# Altium PCB sensors_power_0v2.PcbDoc
Units mm, origin at the board's own origin, x right, y up, seen from the top; angles counter-clockwise.
Board outline 50 x 50 mm, 2 copper layers (Top Layer, Bottom Layer); 60 components, 69 nets, 200 pads, 58 vias.
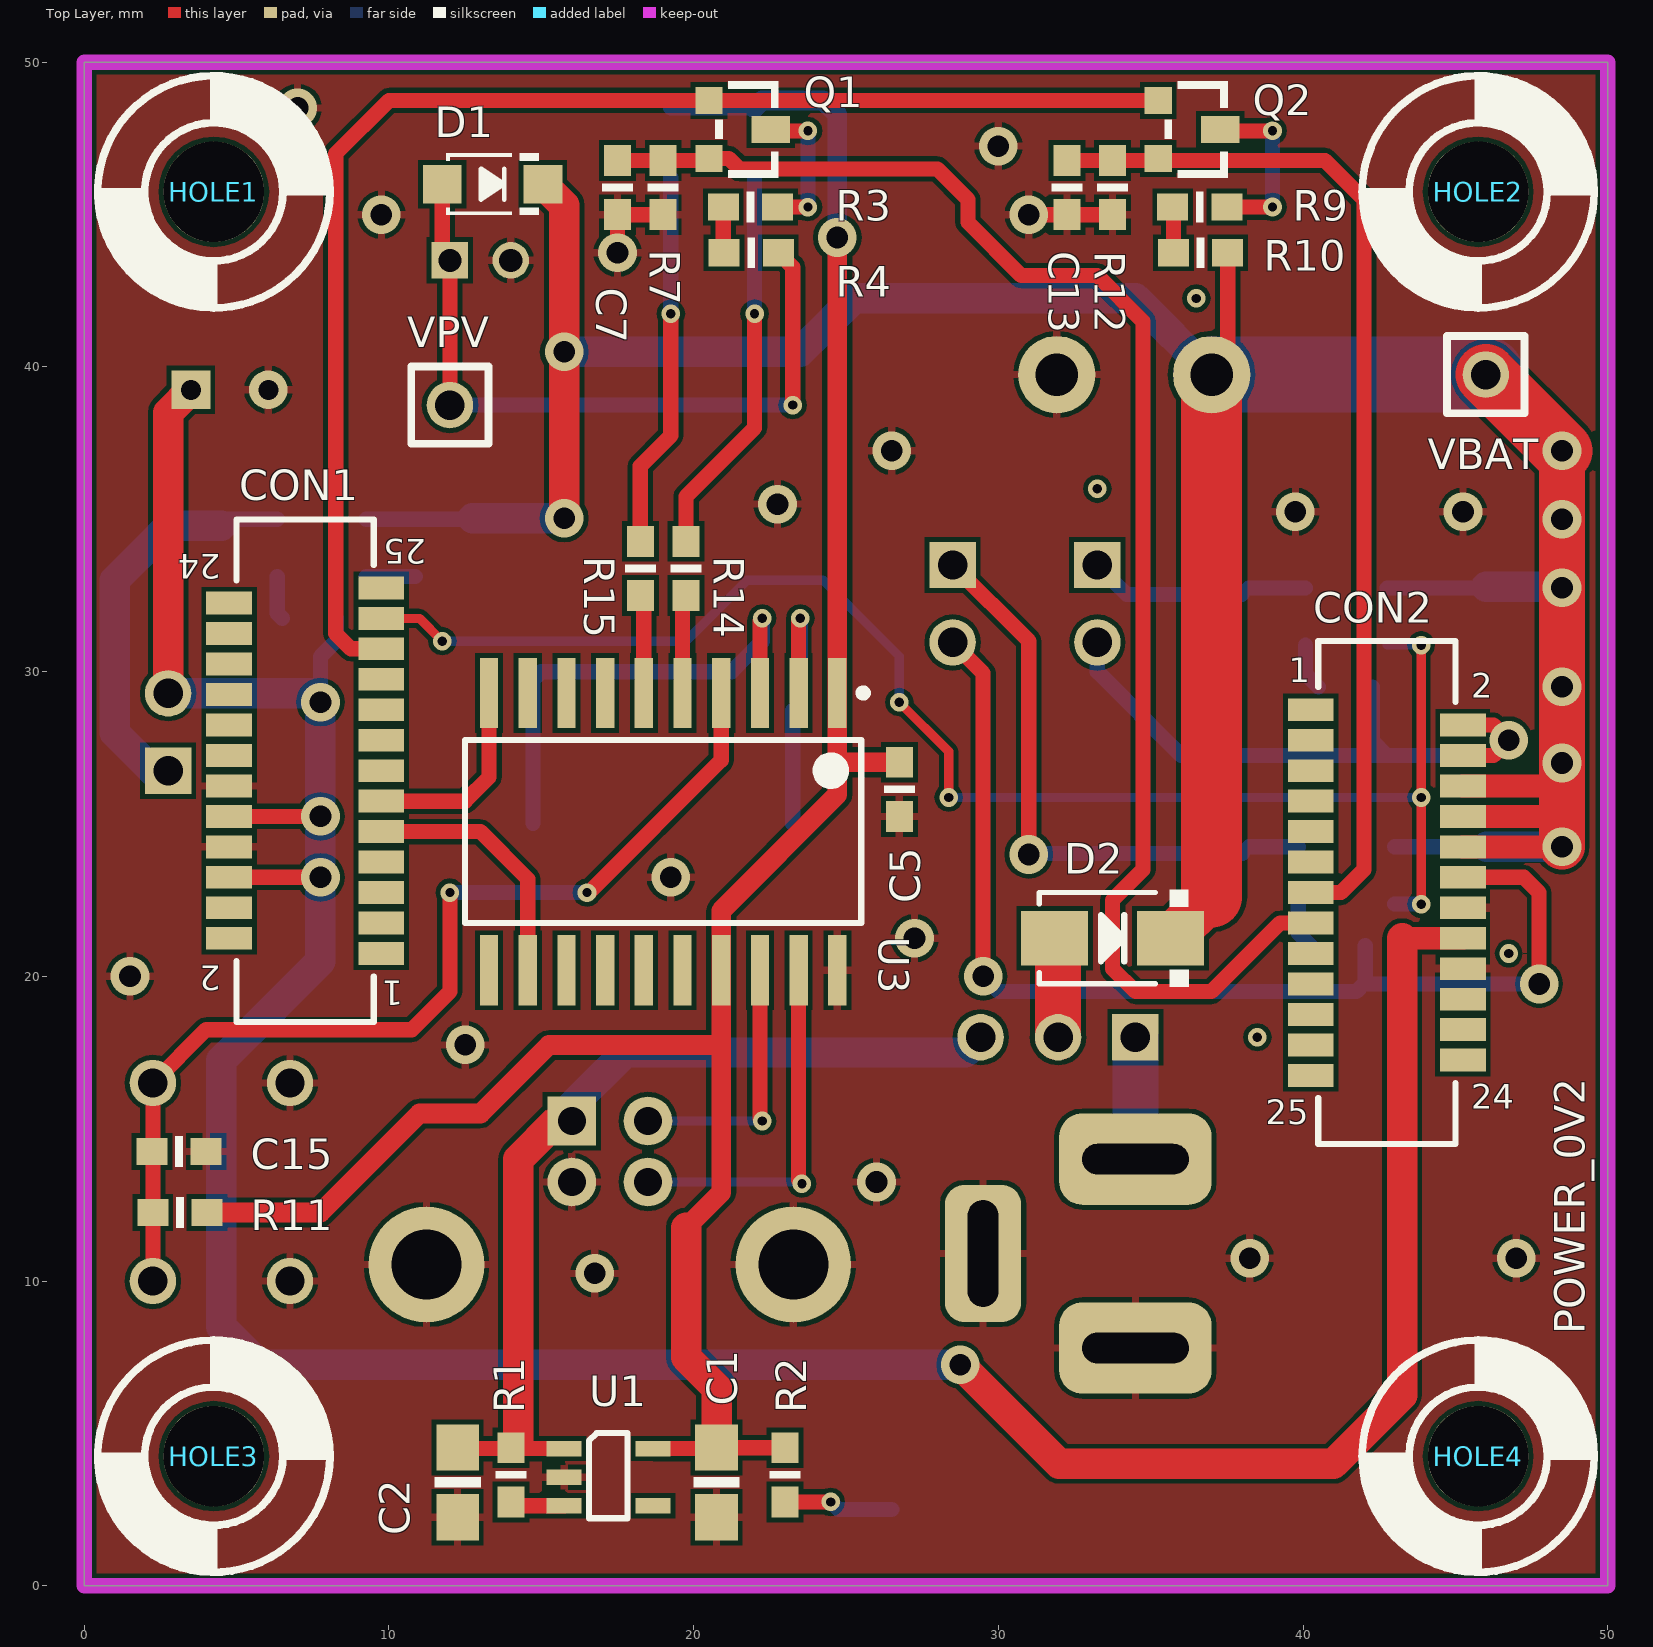
[diagram p0: Top Layer view]
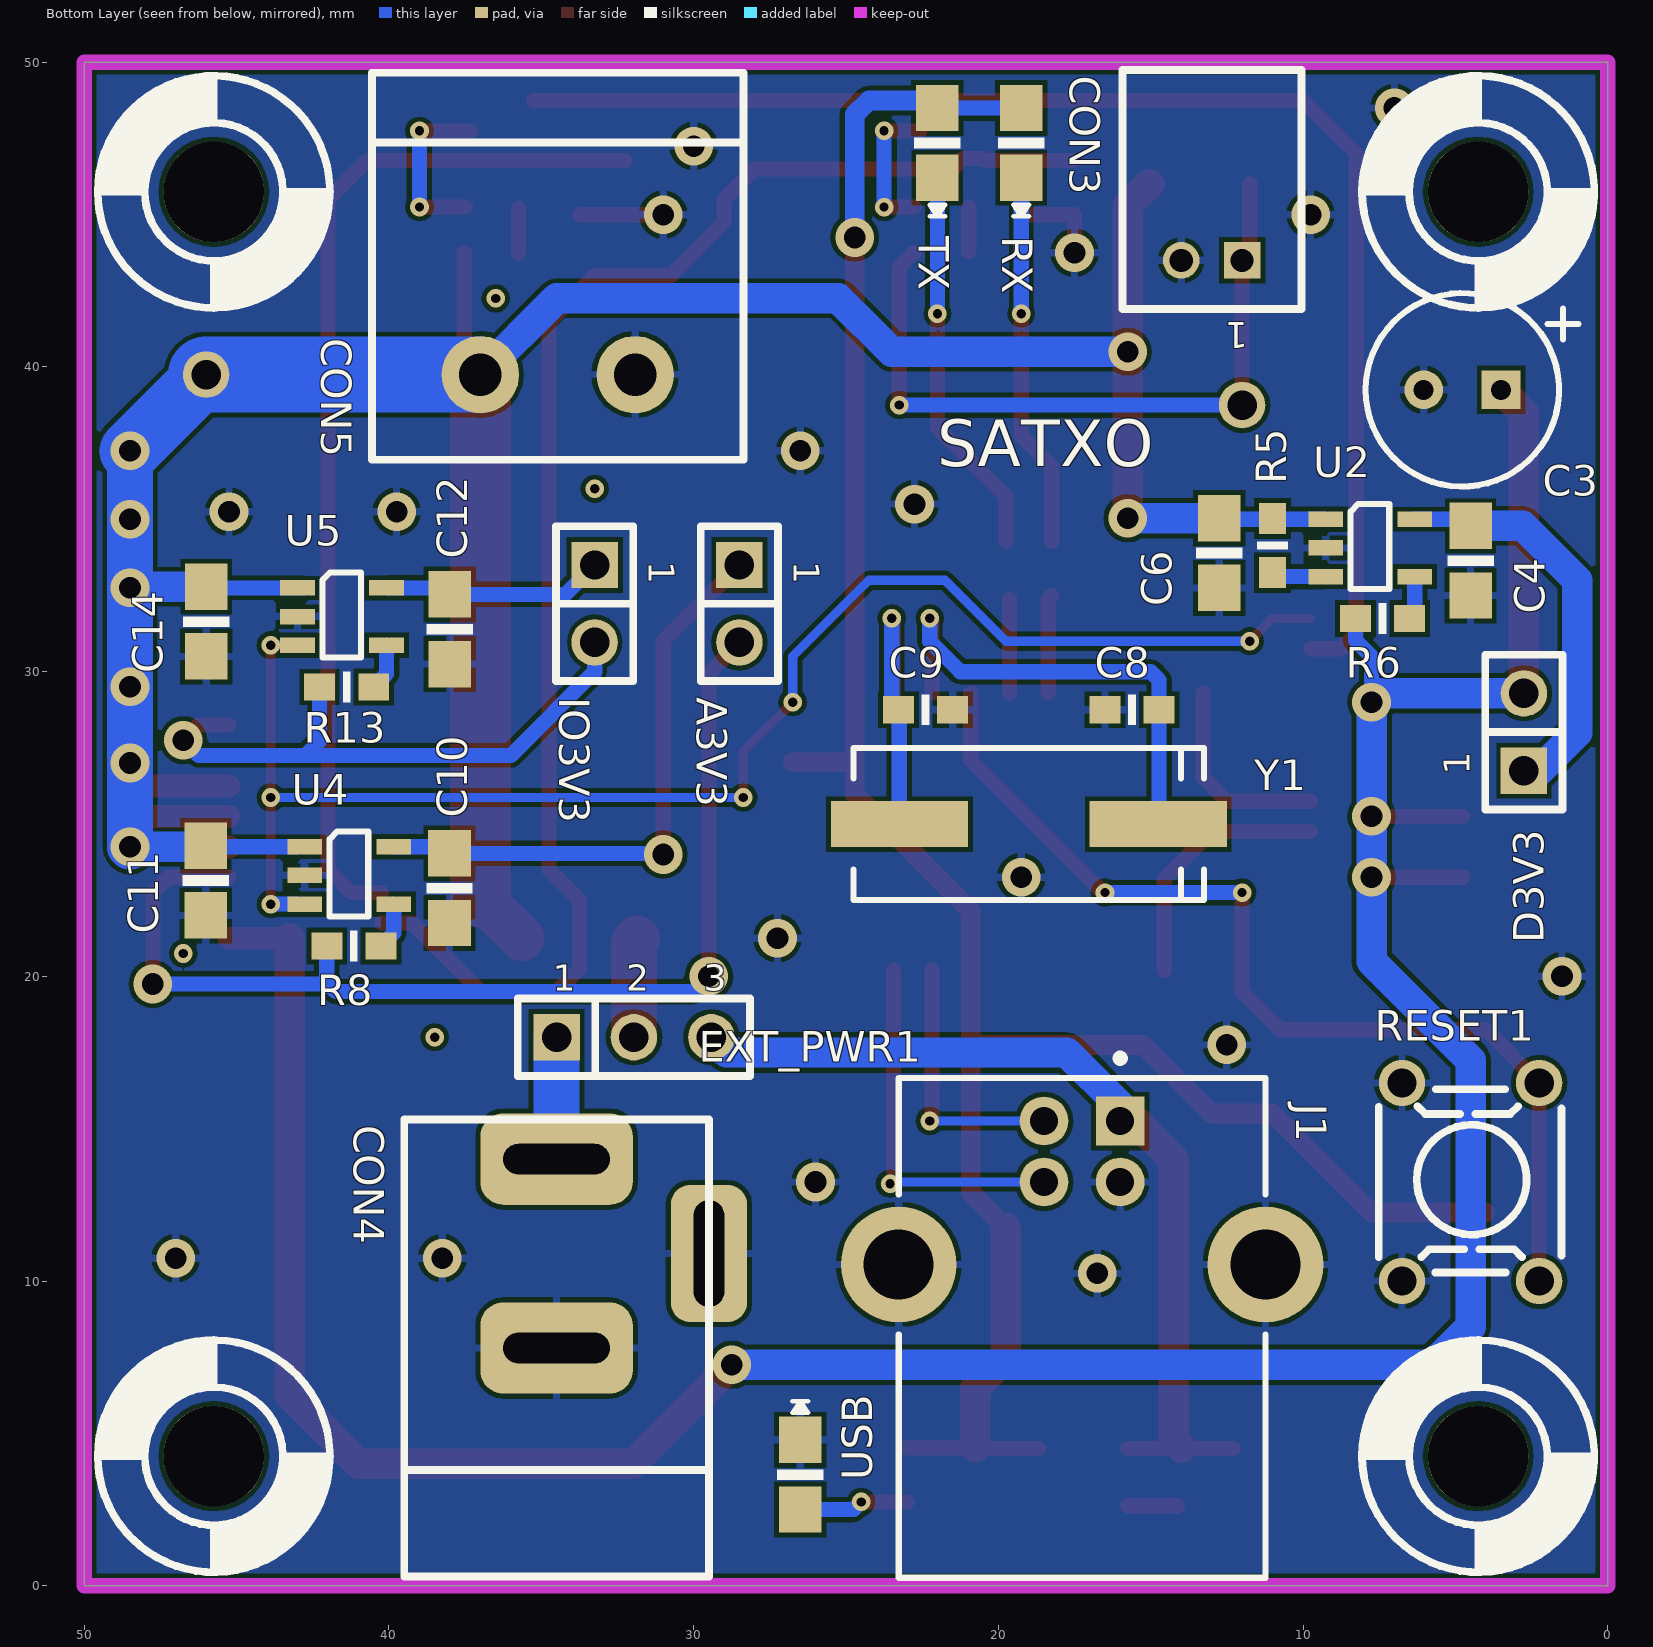
[diagram p1: Bottom Layer view, seen from below]

## Layer stack, top to bottom
Top Layer: signal copper 0.0356
Dielectric: dielectric 0.32, FR-4, Dk 4.8
Bottom Layer: signal copper 0.0356

## Board outline
0,0 50,0 50,50 0,50 0,0

## Design rules (kind name [scope] priority, off if disabled: settings)
Clearance [All] p1: gap=0.152
HoleSize [All] p1: absolutevalues=TRUE maxlimit=2.54 minlimit=0.305 maxpercent=80.000 minpercent=20.000
PolygonConnect [All] p1: connectstyle=Relief reliefconductorwidth=0.254 reliefentries=4 polygonreliefangle="90 Angle"
RoutingVias [All] p1: holewidth=0.508 width=0.762 viastyle="Through Hole" minholewidth=0.305 minwidth=0.61 maxholewidth=0.711 maxwidth=1.27
SilkscreenOverComponentPads [All] p1: minsilkscreentomaskgap=0.254
SolderMaskExpansion [All] p1: expansion=0.102
Width [All] p1: maxlimit=2.54 minlimit=0.152 preferedwidth=0.254
26 further rules are at their usual default settings.

## Components (designator, comment, footprint, x,y, rotation, side; value= is the part's Value field where it differs from the comment)
A3V3 "2P" SIP-2 28.5,33.5 r270 bottom
C1 "1uF" 0805 20.75,2.249 r90 top
C2 "4.7uF" 0805 12.25,2.249 r90 top
C3 "100uF" RADIAL-2.5MM 3.499,39.25 r0 bottom
C4 "10uF" 0805 4.5,32.499 r90 bottom
C5 "100nF" 0603 26.75,25.249 r90 top
C6 "4.7uF" 0805 12.75,32.75 r90 bottom
C7 "10nF" 0603 17.5,45 r90 top
C8 "18pF" 0603 16.5,28.75 r180 bottom
C9 "18pF" 0603 21.5,28.75 r0 bottom
C10 "1uF" 0805 38.015,21.75 r90 bottom
C11 "4.7uF" 0805 46.014,22 r90 bottom
C12 "1uF" 0805 38,30.25 r90 bottom
C13 "10nF" 0603 32.25,45 r90 top
C14 "4.7uF" 0805 46,30.5 r90 bottom
C15 "100nF" 0603 4,14.25 r180 top
CON1 "25P" DF9-25 9.75,20.75 r180 top locked
CON2 "25P" DF9-25 40.25,28.75 r0 top locked
CON3 "2P" JST-2MM 11.999,43.5 r0 bottom
CON4 "3P" JACKPOW/PD-2.5MM-TH 34.499,14 r270 bottom
CON5 "2P" INTERLOCK2-5MM 37.001,39.75 r180 bottom
D1 "PMEG2010E" SOD-123 11.75,46.001 r0 top
D2 "RGF1D" DO-214BA 33.75,21.251 r0 top
D3V3 "2P" SIP-2 2.75,26.749 r90 bottom
EXT_PWR1 "3P" SIP-3 34.5,18.001 r180 bottom
HOLE1 "HOLE" NPTH-3MM 4.25,45.75 r0 top locked
HOLE2 "HOLE" NPTH-3MM 45.75,45.75 r0 top locked
HOLE3 "HOLE" NPTH-3MM 4.25,4.25 r0 top locked
HOLE4 "HOLE" NPTH-3MM 45.75,4.25 r0 top locked
IO3V3 "2P" SIP-2 33.25,33.5 r270 bottom
J1 "440119-4" 440119 17.25,14.251 r270 bottom
Q1 "BSS138" SOT-23@GSD 20.5,48.751 r270 top
Q2 "BSS138" SOT-23@GSD 35.25,48.75 r270 top
R1 "10k" 0603 14,2.749 r90 top
R2 "470R" 0603 23,2.749 r90 top
R3 "20k" 0603 22.751,45.25 r180 top
R4 "20k" 0603 20.999,43.75 r0 top
R5 "10k" 0603 11,33.249 r90 bottom
R6 "100k" 0603 6.499,31.75 r0 bottom
R7 "20k" 0603 19,45 r90 top
R8 "100k" 0603 40.264,21 r0 bottom
R9 "20k" 0603 37.5,45.25 r180 top
R10 "20k" 0603 35.75,43.75 r0 top
R11 "10K" 0603 2.25,12.25 r0 top
R12 "20k" 0603 33.75,45 r90 top
R13 "100k" 0603 40.5,29.5 r0 bottom
R14 "470R" 0603 19.75,32.5 r90 top
R15 "470R" 0603 18.25,32.5 r90 top
RESET1 "RESET" MICROSWITCH 6.75,16.5 r180 bottom
RX "LED" 0805@DIODE 19.25,48.5 r270 bottom
TX "LED" 0805@DIODE 22,48.5 r270 bottom
U1 "MCP1824T" SOT-23-5 15.749,4.5 r0 top
U2 "MCP1824T" SOT-23-5 9.251,35 r180 bottom
U3 "MCP2200" SOIC-20 19,24.75 r270 top
U4 "MCP1824T" SOT-23-5 42.765,24.25 r180 bottom
U5 "MCP1824T" SOT-23-5 43,32.75 r180 bottom
USB "LED" 0805@DIODE 26.501,2.5 r90 bottom
VBAT "Test Point" TERMINAL 45.999,39.75 r90 top
VPV "Test Point" TERMINAL 11.999,38.75 r90 top
Y1 "12MHz" CSM-7 19,25 r0 bottom

## Footprints (in the part's own frame and the unit in brackets; to place one, negate y for a bottom-side part, rotate by r counter-clockwise, add the part's x,y. Pads: shape width x height; smd on the part's side, far side on the other; paste and mask are expansions set on the pad)
0603 [mil]
  rect 40x35 smd: 1(0,0) 2(70,0)
  silkscreen extent 30,-20 40,20
0805 [mil]
  rect 60x55 smd: 1(0,0) 2(90,0)
  silkscreen extent 38,-30 52,30
0805@DIODE [mil]
  rect 60x55 smd: A(0,0) K(90,0)
  silkscreen extent 38,-30 140,30
440119 [mm] "Connector; USB1.1, Type B, Thru-Hole; 4 Position; Right Angle"
  rect 1.6x1.6 hole 0.92: 1(-1,1.25)
  round 1.6 hole 0.92: 2(-1,-1.25) 3(1,-1.25) 4(1,1.25)
  round 3.8 hole 2.3: 5(3.71,6.02) 6(3.71,-6.02)
  silkscreen extent -3.18,-6.02 13.99,6.02
CSM-7 [mm] "Quartz Crystal, SM; 2 Leads; Body 11.4 x 4.8 x 5 mm (LxWxH)"
  rect 4.5x1.5 smd: 1(-4.25,0) 2(4.25,0)
  silkscreen extent -5.75,-2.5 5.75,2.5
DF9-25 [mm] "Hirose DF9 25P CON"
  rect 1.5x0.75 smd: 1(0,0) 2(5,-0.5) 3(0,-1) 4(5,-1.5) 5(0,-2) 6(5,-2.5) 7(0,-3) 8(5,-3.5) 9(0,-4) 10(5,-4.5) 11(0,-5) 12(5,-5.5) 13(0,-6) 14(5,-6.5) 15(0,-7) 16(5,-7.5) 17(0,-8) 18(5,-8.5) 19(0,-9) 20(5,-9.5) 21(0,-10) 22(5,-10.5) 23(0,-11) 24(5,-11.5) 25(0,-12)
  silkscreen extent 0.25,-14.25 4.75,2.25
DO-214BA [mm] "Small Signal Schottky Diode"
  rect 2.2x1.8 smd: A(-1.9,0) K(1.9,0)
  silkscreen extent -2.4,-1.6 2.5,1.6
INTERLOCK2-5MM [mil]
  round 100 hole 55: 1(0,0) 2(200,0)
  silkscreen extent -140,-110 340,390
JACKPOW/PD-2.5MM-TH [mm] "Jack Power 2.5mm with insertion detect - Through Hole"
  rrect50% 3x5 hole 1 slot 3.5 at 90 deg: 1(0,0) 2(6.2,0)
  rrect50% 4.5x2.5 hole 1 slot 3.5 at 0 deg: 3(3.1,5)
  silkscreen extent -1.3,-5 13.7,5
JST-2MM [mm] "JST 2mm header side entry"
  rect 1.2x1.2 hole 0.762: 1(0,0)
  round 1.2 hole 0.762: 2(2,0)
  silkscreen extent -1.95,-6.25 3.93,1.6
MICROSWITCH [mil]
  round 60 hole 38: 1(0,0) 2(177.16,0) 3(0,-255.9) 4(177.16,-255.9)
  silkscreen extent -30,-245 206,-8
NPTH-3MM [mil]
  round 130 hole 130 unplated: 1(0,0)
  silkscreen extent -150,-150 150,150
RADIAL-2.5MM [mil]
  rect 50x50 hole 26: 1(0,0)
  round 50 hole 26: 2(100,0)
  silkscreen extent -100,-125 175,125
SIP-2 [mil]
  rect 60x60 hole 38: 1(0,0)
  round 60 hole 38: 2(100,0)
  silkscreen extent -50,-50 150,50
SIP-3 [mil]
  rect 60x60 hole 38: 1(0,0)
  round 60 hole 38: 2(100,0) 3(200,0)
  silkscreen extent -50,-50 250,50
SOD-123 [mil]
  rect 50x50 smd: A(0,0) K(130,0)
  silkscreen extent 5,-40 125,40
SOIC-20 [mm] "20-Pin Plastic Wide Body Small Outline Integrated Circuit 1.27 mm Pitch, IPC Medium Density"
  rect 2.3x0.6 smd: 1(-4.55,5.715) 2(-4.55,4.445) 3(-4.55,3.175) 4(-4.55,1.905) 5(-4.55,0.635) 6(-4.55,-0.635) 7(-4.55,-1.905) 8(-4.55,-3.175) 9(-4.55,-4.445) 10(-4.55,-5.715) 11(4.55,-5.715) 12(4.55,-4.445) 13(4.55,-3.175) 14(4.55,-1.905) 15(4.55,-0.635) 16(4.55,0.635) 17(4.55,1.905) 18(4.55,3.175) 19(4.55,4.445) 20(4.55,5.715)
  silkscreen extent -4.67,-6.5 3,6.69
SOT-23-5 [mil]
  rect 45x20 smd: 1(0,0) 2(0,-37) 3(0,-74) 4(115,-74) 5(115,0)
  silkscreen extent 32,-90 82,20
SOT-23@GSD [mil] "SOT-23 (1-Gate , 2-Source, 3-Drain)"
  rect 35x50 smd: D(37.5,80)
  rect 35x35 smd: G(0,0) S(75,0)
  silkscreen extent -25,8 100,90
TERMINAL [mil]
  round 60 hole 37.99: 1(0,0)
  silkscreen extent -50,-50 50,50

## Part data
A3V3 D3V3 IO3V3: library part JMP2, "2-pin Jumper"
C1 C2 C4 C5 C6 C7 C8 C9 C10 C11 C12 C13 C14 C15: library part CAP, "Capacitor"
C3: library part "CAP POL", "Polarized Capacitor"
CON1 CON2: library part CON25, "Connector 25 Pins"
CON3 CON5: library part CON02, "Connector 2 pins"
CON4: library part "JACK POWER PD", "Jack Power with insertion detect"
D1: library part "Diode Schottky", "Small Signal Schottky Diode"
D2: library part Diode, "Vishay Standard Avalanche Sinterglass Diode"
EXT_PWR1: library part JMP3, "3-Jumper"
HOLE1 HOLE2 HOLE3 HOLE4: library part "PCB HOLE", "PCB Fixation Hole M3"
J1: "USB 1.1, Right Angle, Thru-Hole, B Type, Receptacle, 4 Position, Black"
Q1 Q2: library part MOSFET-N, "N-Channel Logic Level Enhancement Mode Field Effect Transistor"
R1 R2 R3 R4 R5 R6 R7 R8 R9 R10 R11 R12 R13 R14 R15: library part RES, "Resistor"
RESET1: library part SW1, "Switch Push Button"
RX TX USB: "Light emitting diode"
U1 U2 U4 U5: "300 mA, Low Voltage, Low Quiescent Current LDO Regulator, 5-Pin SOT-23, Extended Temperature, Tape and Reel"
U3: "USB to Serial interface"
VBAT VPV: library part TEST-PROBE, "Test/Probe Point"
Y1: library part "Crystal Oscillator", "Crystal Oscillator"

## Via types
v1: diameter 1.27, hole 0.711, Top Layer to Bottom Layer, 34 vias
v2: diameter 0.61, hole 0.305, Top Layer to Bottom Layer, 24 vias

## Nets (pads, with @x,y where several pads share a name; then routed paths per layer and width w, separated by ;. In a path a pad name is that pad's centre, name@x,y a point inside that pad or via, vN(x,y) a via of type N, cw(c..) or ccw(c..) an arc to the next point about the centre after c; other vN are vias at no path point)
1WIRE_SN: CON1.1
A3V3: A3V3.2 CON2.12 R8.2 | length 36.9
  Top Layer w0.5: A3V3.2 29.5,29.961 v1(29.5,20) ; CON2.12 47.25,23.25 47.75,22.75 v1(47.75,19.75)
  Bottom Layer w0.5: v1(29.5,20) 30,19.5 41.75,19.5 42.042,19.792 R8.2 ; 42.042,19.75 v1(47.75,19.75)
D3V3: C3.1 CON1.6 CON1.10 CON2.16 D3V3.2 R6.2 | length 104.8
  Top Layer w0.5: CON1.6 v1(7.75,23.25) ; CON1.10 v1(7.75,25.25)
  Top Layer w0.75: 43.25,21.25 CON2.16
  Top Layer w1: D3V3.2 2.75,38.501 C3.1 ; v1(28.75,7.25) 32,4 41,4 43.25,6.25 43.25,21.25
  Bottom Layer w0.5: v1(7.75,29) 7.75,30.5 8.277,31.027 R6.2
  Bottom Layer w1: D3V3.2 7.461,29.289 v1(7.75,29) v1(7.75,25.25) v1(7.75,23.25) 7.75,20.5 4.5,17.25 4.5,8.5 5.75,7.25 v1(28.75,7.25)
D+: J1.3 U3.19 | length 11.9
  Top Layer w0.5: v2@23.445,13.305 U3.19
  Bottom Layer w0.3: J1.3 v2@23.554,13.251
  other v2: 23.554,13.196
D-: J1.2 U3.18 | length 8.6
  Top Layer w0.5: v2@22.175,15.325 U3.18
  Bottom Layer w0.3: J1.2 v2(22.249,15.251)
EN_AVDD: CON1.23 U4.3 U5.3 | length 50.5
  Top Layer w0.3: CON1.23 11,31.75 v2(11.75,31) ; v2(26.75,29) 28.37,27.38 v2(28.37,25.87) ; v2(43.88,22.37) v2(43.88,25.87) v2(43.88,30.87)
  Bottom Layer w0.3: v2(11.75,31) 19.75,31 21.75,33 24.25,33 26.75,30.5 v2(26.75,29) ; v2(28.37,25.87) v2(43.88,25.87) ; U5.3@42.765,30.87 v2(43.88,30.87)
  Bottom Layer w0.5: U4.3@43,22.37 v2(43.88,22.37)
GND: C1.1 C2.1 C3.2 C4.1 C5.1 C6.1 C7.1 C8.1 C9.1 C10.1 C11.1 C12.1 C13.1 C14.1 C15.1 CON1.8 CON1.12 CON2.14 CON2.18 CON3.2 CON4.2 CON4.3 CON5.2 J1.4 J1.5 J1.6 R7.1 R12.1 RESET1.1 RESET1.3 U1.2 U2.2 U3.20 U4.2 U5.2 USB.K | length 5.7
  Top Layer w0.5: v1@17.5,43.5 C7.1 R7.1 ; v1(31,45) C13.1 R12.1
  other v1: 16.75,10.25 38.25,10.75 47,10.75 26,13.25 12.5,17.75 1.5,20 27.25,21.25 19.25,23.25 39.75,35.25 45.25,35.25 22.75,35.5 26.5,37.25 17.5,43.75 9.75,45 30,47.25 7,48.5
IO3V3: CON2.2 CON2.4 IO3V3.2 R13.2 | length 21.7
  Top Layer w0.5: CON2.4 46.25,27.25 v1(46.75,27.75) 46.25,28.25 CON2.2
  Bottom Layer w0.5: IO3V3.2 33.25,30 36,27.25 42.75,27.25 ; R13.2 42.278,27.722 42.75,27.25 ; v1(46.75,27.75) 46.25,27.25 42.75,27.25
NetA3V3_1: A3V3.1 C10.2 U4.5 | length 19.1
  Top Layer w0.5: A3V3.1 31,31.001 v1(31,24)
  Bottom Layer w0.5: v1@31.036,24.036 C10.2 ; C10.2@38.229,24.25 U4.5
NetC4_2: C4.2 D3V3.1 U2.5 | length 13.4
  Bottom Layer w0.5: C4.2 4.714,35 U2.5
  Bottom Layer w1: D3V3.1 2.251,26.749 1,28 1,33 2.785,34.785 C4.2
NetC8_2: C8.2 U3.3 Y1.1 | length 15.9
  Top Layer w0.5: U3.3 v2@22.175,31.675
  Bottom Layer w0.5: Y1.1@14.722,25.027 C8.2 14.722,29.722 15,30 21.25,30 22.25,31 v2(22.25,31.75)
NetC9_2: C9.2 U3.2 Y1.2 | length 9.2
  Top Layer w0.5: U3.2 v2@23.445,31.695
  Bottom Layer w0.5: Y1.2 C9.2@23.25,28.722 ; C9.2 23.5,28.973 v2(23.5,31.75)
NetC12_2: C12.2 IO3V3.1 U5.5 | length 7
  Bottom Layer w0.5: IO3V3.1 34.215,32.536 C12.2 ; C12.2@38.214,32.75 U5.5
NetCON4_1: CON4.1 EXT_PWR1.1 | length 4
  Bottom Layer w1.5: CON4.1 34.499,18 EXT_PWR1.1
NetD2_A: D2.A EXT_PWR1.2 | length 3.3
  Top Layer w1.5: D2.A 31.96,21.141 EXT_PWR1.2
NetQ1_D: Q1.D R3.1 | length 4.7
  Top Layer w0.5: Q1.D@22.58,47.75 v2(23.75,47.75) ; R3.1 v2(23.75,45.25)
  Bottom Layer w0.5: v2(23.75,45.25) v2(23.75,47.75)
NetQ2_D: Q2.D R9.1 | length 5.7
  Top Layer w0.5: Q2.D@37.33,47.75 v2(39,47.75) ; R9.1 v2(39,45.25)
  Bottom Layer w0.5: v2(39,45.25) v2(39,47.75)
NetR1_1: R1.1 U1.3 | length 1.6
  Top Layer w0.5: R1.1@14.129,2.62 U1.3
NetR2_1: R2.1 USB.A | length 3.6
  Top Layer w0.5: R2.1 v2(24.499,2.749)
  Bottom Layer w0.5: v2(24.499,2.749) 24.749,2.5 USB.A
NetR3_2: R3.2 R4.1 | length 1.5
  Top Layer w0.5: R4.1@20.973,43.777 R3.2
NetR5_1: R5.1 U2.3 | length 1.6
  Bottom Layer w0.5: U2.3 R5.1@10.871,33.12
NetR6_1: R6.1 U2.4 | length 1.4
  Bottom Layer w0.5: U2.4 6.33,31.92 R6.1
NetR8_1: R8.1 U4.4 | length 1.5
  Bottom Layer w0.5: U4.4 39.844,21.42 R8.1
NetR9_2: R9.2 R10.1 | length 1.5
  Top Layer w0.5: R10.1 R9.2@35.75,45.223
NetR13_1: R13.1 U5.4 | length 1.5
  Bottom Layer w0.5: U5.4 40.079,29.92 R13.1
NetR14_2: R14.2 TX.K | length 12.9
  Top Layer w0.5: R14.2 19.75,35.75 22,38 v2(22,41.75)
  Bottom Layer w0.5: v2(22,41.75) TX.K@22,46.214
NetR15_2: R15.2 RX.K | length 12.4
  Top Layer w0.5: R15.2 18.25,36.75 19.25,37.75 v2(19.25,41.75)
  Bottom Layer w0.5: v2(19.25,41.75) RX.K@19.25,46.214
PB0: CON1.4
PB4: CON1.2
PD4: CON1.7
PD5: CON1.5
PD6: CON1.3
PE2: CON2.20
PE3: CON2.25
PE4: CON2.23
PE5: CON2.21
PE6: CON2.19
PE7: CON2.17
PF2: CON2.11
PF3: CON2.9
PF4: CON2.7
PF5: CON2.5
PF6: CON2.3
PF7: CON2.1
PG2: CON1.19
PG5: CON1.17
PV_OUT: C7.2 CON2.15 Q1.S R7.2 | length 49.2
  Top Layer w0.5: C7.2 R7.2 Q1.S@20.432,46.778 ; Q1.S 21.154,46.846 21.5,46.5 28,46.5 29,45.5 29,44.75 30.75,43 33.25,43 34.75,41.5 34.75,23.5 33.75,22.5 33.75,20.25 34.5,19.5 37,19.5 39.25,21.75 CON2.15
READ_VIN: CON1.21 Q1.G Q2.G | length 45.2
  Top Layer w0.5: CON1.21 8.75,30.75 8.25,31.25 8.25,47 10.001,48.751 Q1.G Q2.G
RSTZ: CON1.25
RSTZ_UART: C15.2 R11.1 RESET1.2 RESET1.4 U3.4 | length 33.6
  Top Layer w0.5: RESET1.4 RESET1.2 4,18.25 10.75,18.25 12,19.5 v2(12,22.75) ; v2@16.56,22.75 20.905,27.095 U3.4
  Bottom Layer w0.5: v2(12,22.75) v2(16.5,22.75)
RX232: R15.1 U3.6 | length 3.2
  Top Layer w0.5: R15.1 18.365,32.385 U3.6
SCL: CON1.15
SDA: CON1.13
STACK_BUS1: CON1.14
STACK_BUS2: CON1.16
STACK_BUS3: CON1.18
STACK_BUS4: CON1.20
STACK_BUS5: CON1.22
STACK_BUS6: CON1.24
TX232: R14.1 U3.5 | length 3.1
  Top Layer w0.5: U3.5 R14.1@19.635,32.385
UART0_RX: CON2.24
UART0_TX: CON2.22
UART1_RX: CON1.11 U3.10 | length 6.6
  Top Layer w0.5: CON1.11 12.5,25.75 13.285,26.535 U3.10
UART1_TX: CON1.9 U3.12 | length 8.4
  Top Layer w0.5: CON1.9 13,24.75 14.555,23.195 U3.12
VBAT: C6.2 C11.2 C14.2 CON2.6 CON2.8 CON2.10 CON5.1 D1.K D2.K R5.2 R10.2 U2.1 U4.1 U5.1 VBAT.1 | length 126.9
  Top Layer w0.5: CON5.1 37.528,40.277 R10.2
  Top Layer w0.75: CON2.10 v1(48.5,24.25) ; CON2.8 48.5,25.25 ; CON2.6 48.5,26.25
  Top Layer w1: D1.K 15.75,45.303 v1(15.75,40.5) v1(15.75,35.036)
  Top Layer w1.5: D2.K 37.001,22.602 ; v1(48.5,24.25) v1(48.5,27) v1(48.5,29.5) v1(48.5,32.75) v1(48.5,35) v1@48.5,37.249
  Top Layer w2: 37.001,22.602 CON5.1 ; VBAT.1 v1(48.501,37.249)
  Bottom Layer w0.5: U2.1 C6.2@12.714,35 ; U5.1@42.765,32.75 C14.2@45.978,32.75 ; U4.1@43,24.25 C11.2@45.964,24.25
  Bottom Layer w1: C6.2 v1(15.75,35.036) ; v1(15.75,40.5) 23.5,40.5 25.25,42.25 34.501,42.25 CON5.1 ; C14.2@46.014,32.786 v1@48.464,32.786 ; C11.2@46.036,24.25 v1(48.5,24.25)
  Bottom Layer w1.5: v1(48.5,24.25) v1(48.5,27) v1(48.5,29.5) v1(48.5,32.75) v1(48.5,35) v1@48.5,37.249
  Bottom Layer w2: VBAT.1 v1@48.5,37.249
  Bottom Layer w2.5: CON5.1 VBAT.1
VBAT_OUT: C13.2 CON2.13 Q2.S R12.2 | length 34.3
  Top Layer w0.5: C13.2 R12.2 40.722,46.778 42,45.5 42,23.5 41.25,22.75 CON2.13
VEXT: C2.2 EXT_PWR1.3 J1.1 R1.2 U1.1 | length 30.2
  Top Layer w0.5: C2.2@12.286,4.5 U1.1
  Top Layer w1: R1.2 14.25,4.777 14.25,14 15.501,15.251 J1.1
  Bottom Layer w1: J1.1 16,15.75 17.75,17.5 28.919,17.5 EXT_PWR1.3
VPV: CON3.1 D1.A R4.2 VPV.1 | length 23.8
  Top Layer w0.5: D1.A 11.75,43.749 CON3.1 VPV.1 ; R4.2 23.25,43.277 v2(23.25,38.75)
  Bottom Layer w0.5: VPV.1 v2(23.25,38.75)
VUSB: C1.2 C5.2 R2.2 R11.2 RX.A TX.A U1.5 U3.1 U3.17 | length 77.4
  Top Layer w0.5: U1.5 C1.2@20.731,4.5 ; C1.2@20.758,4.527 R2.2
  Top Layer w0.65: R11.2 7.75,12.25 11,15.5 13,15.5 15.25,17.75 20.905,17.75 ; 19.75,11.75 20.905,12.905 20.905,17.75 ; v1(24.715,44.25) U3.1 24.715,25.965 20.905,22.155 U3.17 20.905,17.75 ; 24.742,27.027 C5.2
  Top Layer w1: 19.75,11.75 19.75,7.5 20.75,6.5 C1.2
  Bottom Layer w0.5: RX.A TX.A
  Bottom Layer w0.65: TX.A 22.25,48.75 24.25,48.75 24.715,48.285 v1(24.715,44.25)
pads on no net: HOLE1.1 HOLE2.1 HOLE3.1 HOLE4.1 U1.4 U3.7 U3.8 U3.9 U3.11 U3.13 U3.14 U3.15 U3.16
copper on no net:
  other v2: 38.5,18 46.75,20.75 33.25,36 36.5,42.25

## Polygon pours and split planes (outlines as drawn)
GND on Bottom Layer "GND" (solid, pour order 5): 0,0 0,50 50,50 50,0 0,0
GND on Top Layer "GND" (solid, pour order 3): 0,0 0,50 50,50 50,0 0,0

## Keep-outs
Keep-Out Layer:
  lines w0.5: 0,0 25,0 50,0 50,50 0,50 0,25 0,0

## Silkscreen, mask and mechanical layers (free items; w line width, h text height)
Top Overlay:
  text "POWER_0V2" at 49.25,8.25 h1 r90
Bottom Overlay:
  text "SATXO" at 22,36.75 h1.52

## Text inside footprints (layer, text, board x,y; h text height)
A3V3: Bottom Overlay "1" at 26.722,33.627 h0.86 r90
CON1: Top Overlay "25" at 11.225,34.35 h0.8 r180; Top Overlay "24" at 4.475,33.85 h0.8 r180; Top Overlay "2" at 4.475,20.35 h0.8 r180; Top Overlay "1" at 10.475,19.85 h0.8 r180
CON2: Top Overlay "25" at 38.775,15.15 h0.8; Top Overlay "24" at 45.525,15.65 h0.8; Top Overlay "2" at 45.525,29.15 h0.8; Top Overlay "1" at 39.525,29.65 h0.8
CON3: Bottom Overlay "1" at 11.799,41.475 h0.86 r180
D3V3: Bottom Overlay "1" at 4.528,26.622 h0.86 r270
EXT_PWR1: Bottom Overlay "3" at 29.674,19.525 h0.86; Bottom Overlay "1" at 34.627,19.525 h0.86; Bottom Overlay "2" at 32.214,19.525 h0.86
IO3V3: Bottom Overlay "1" at 31.472,33.627 h0.86 r90